# Altium PCB ConverterPCB.PcbDoc
Units mm, origin at the board's own origin, x right, y up, seen from the top; angles counter-clockwise.
Board outline 217.17 x 123.44 mm, 2 copper layers (Top Layer, Bottom Layer); 78 components, 37 nets, 195 pads, 0 vias.
Unrouted connection lines stored in the file: 8.
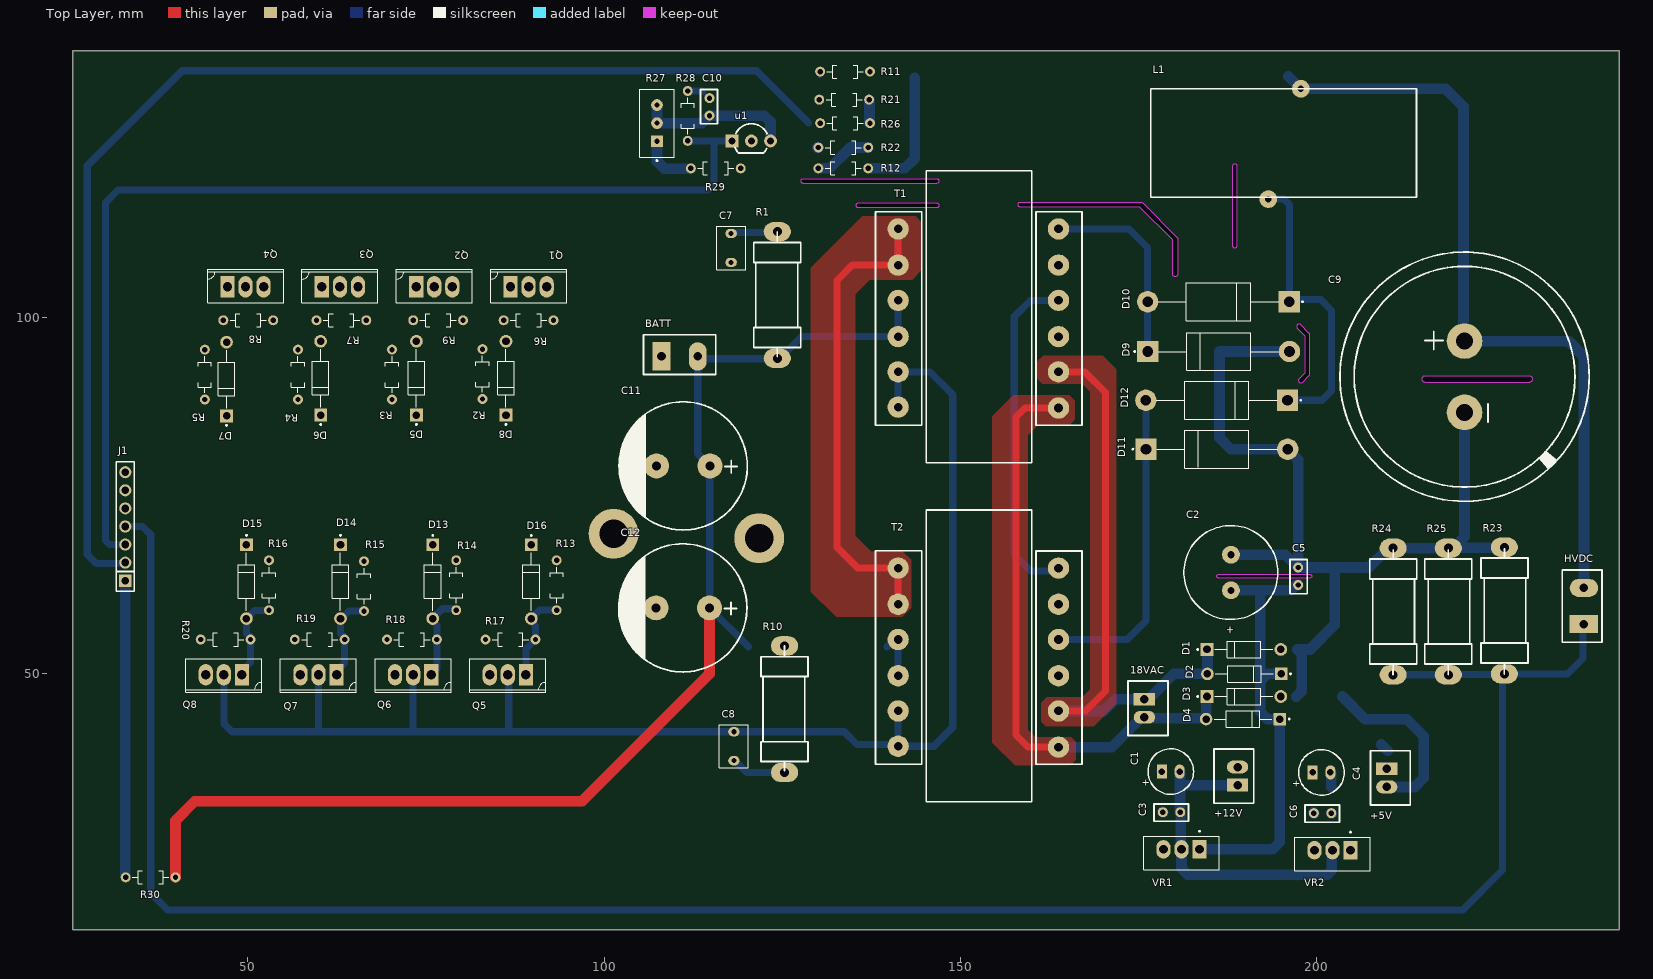
[diagram p0: Top Layer view]
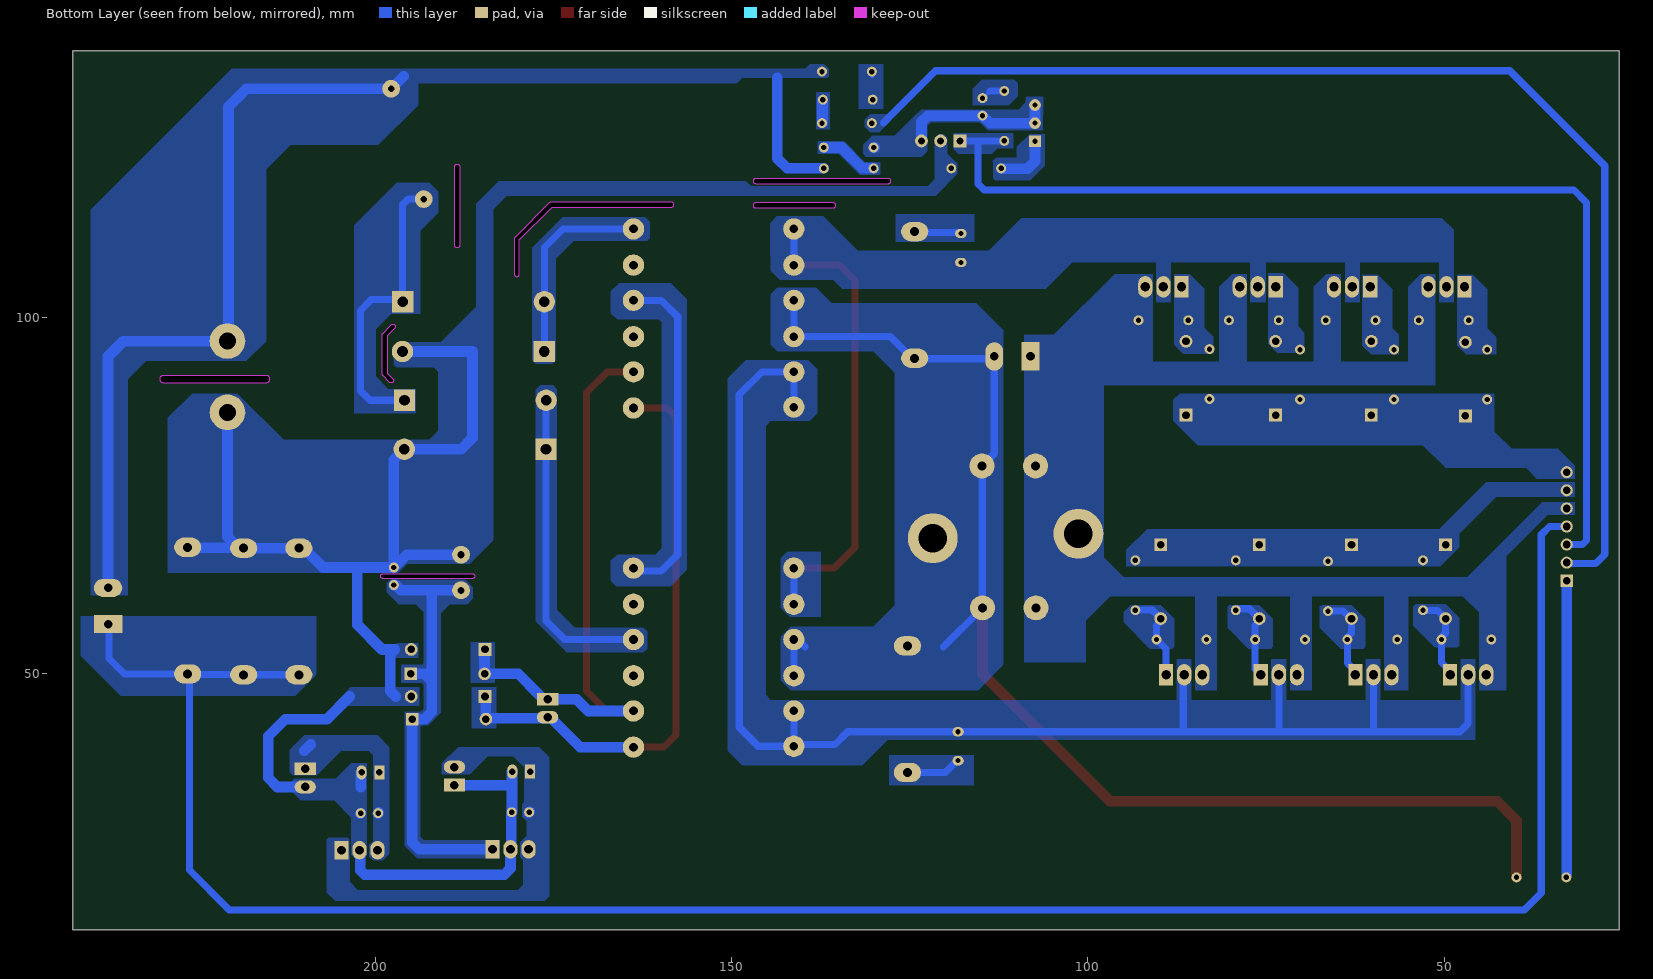
[diagram p1: Bottom Layer view, seen from below]
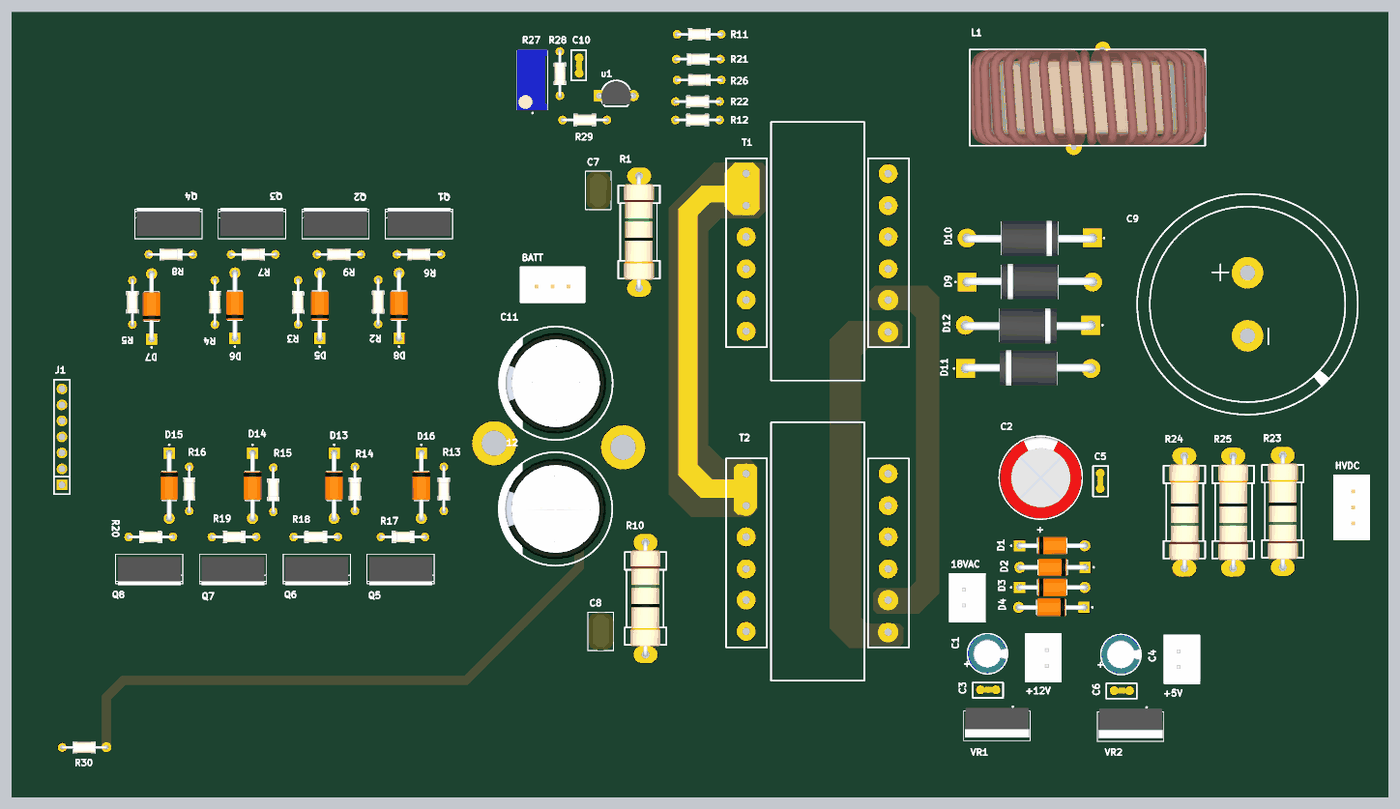
[diagram p2: 3D render of the assembled board from above, using the file's embedded part models]

## Layer stack, top to bottom
Top Solder: solder mask 0.0102, Solder Resist, Dk 3.5
Top Layer: signal copper 0.0356
Dielectric 1: dielectric 0.32, FR-4, Dk 4.8
Bottom Layer: signal copper 0.0356
Bottom Solder: solder mask 0.0102, Solder Resist, Dk 3.5

## Board outline
25.4,13.97 242.57,13.97 242.57,137.414 25.4,137.414
cut-out: 128.016,118.776 cw(c128.016,119.126) 128.016,119.476 146.685,119.476 cw(c146.685,119.126) 147.035,119.126 cw(c146.685,119.126) 146.685,118.776
cut-out: 135.763,115.347 cw(c135.763,115.697) 135.763,116.047 146.685,116.047 cw(c146.685,115.697) 147.035,115.697 cw(c146.685,115.697) 146.685,115.347
cut-out: 158.496,115.474 cw(c158.496,115.824) 158.496,116.174 175.387,116.174 cw(c175.387,115.824) 175.635,116.072 180.461,111.246 cw(c180.213,110.998) 180.563,110.998 180.563,106.045 cw(c180.213,106.045) 179.863,106.045 179.863,110.853 175.242,115.474
cut-out: 188.245,110.109 ccw(c188.595,110.109) 188.945,110.109 188.945,121.158 ccw(c188.595,121.158) 188.245,121.158
cut-out: 197.618,91.363 ccw(c197.866,91.116) 198.114,90.868 199.003,91.757 ccw(c198.755,92.005) 199.105,92.005 199.105,97.536 ccw(c198.755,97.536) 199.003,97.784 197.86,98.927 ccw(c197.612,98.679) 197.364,98.431 198.405,97.391 198.405,92.15
cut-out: 215.392,90.813 cw(c215.392,91.313) 215.392,91.813 229.87,91.813 cw(c229.87,91.313) 230.37,91.313 cw(c229.87,91.313) 229.87,90.813
cut-out: 186.309,63.377 cw(c186.309,63.627) 186.309,63.877 199.136,63.877 cw(c199.136,63.627) 199.386,63.627 cw(c199.136,63.627) 199.136,63.377

## Design rules (kind name [scope] priority, off if disabled: settings)
Clearance [All] p1: gap=0.254 ignorepadtopadclearanceinfootprint=FALSE except(0: Arc-Hole Track-Hole SMDPad-Hole THPad-Hole Via-Hole Fill-Hole Poly-Hole Region-Hole Text-Hole)
Height [All] p1: minheight=0 maxheight=50.4 prefheight=12.7
PolygonConnect [All] p1: connectstyle=Direct reliefconductorwidth=0.254 reliefentries=4 polygonreliefangle="90 Angle" airgapwidth=0.254
RoutingVias [All] p1: holewidth=0.711 width=1.27 viastyle="Through Hole" minholewidth=0.711 minwidth=1.27 maxholewidth=0.711 maxwidth=1.27
SolderMaskExpansion [All] p1: expansion=0.102 istentingtop=FALSE
Width [All] p1: maxlimit=1.5 minlimit=0.254 preferedwidth=0.8 minimp=50.000000 maximp=50.000000 favimp=50.000000
29 further rules are at their usual default settings.

## Classes and differential pairs
component class DC_Power: 18VAC +5V +12V C1 C2 C3 C4 C5 C6 D1 D2 D3 D4 VR1 VR2
component class Converter_Main_HV: BATT C7 C8 C9 C10 C11 C12 D5 D6 D7 D8 D9 D10 D11 D12 D13 D14 D15 D16 HVDC J1 L1 Q1 Q2 Q3 Q4 Q5 Q6 Q7 Q8 Q11 Q12 Q13 R1 R2 R3 R4 R5 R6 R7 R8 R9 R10 R11 R12 R13 R14 R15 R16 R17 R18 R19 R20 R21 R22 R23 R24 R25 R26 R27 R28 R29 R30 T1 T2 u1

## Components (designator, comment, footprint, x,y, rotation, side; value= is the part's Value field where it differs from the comment)
18VAC "2pos" 2POS 175.895,46.355 r270 top
+5V "2pos" 2POS 209.931,36.576 r270 top
+12V "2pos" 2POS 188.976,34.29 r90 top
BATT "2pos-3" "2POS - 3" 110.617,94.488 r0 top
C1 "100UF25V" "CAP LS-2.5mm D6.3 H7 - duplicate" 178.348,36.195 r0 top
C2 "470UF50V" CAP_RADIAL_D13.0_P5.0_H20.0 188.087,64.135 r270 top
C3 "1UFCER" CAP-CER-2.54 179.705,30.48 r180 top
C4 "100UF25V" "CAP LS-2.5mm D6.3 H7 - duplicate" 199.517,36.068 r0 top
C5 "1UFCER" CAP-CER-2.54 197.485,63.627 r270 top
C6 "1UFCER" CAP-CER-2.54 200.914,30.353 r180 top
C7 "0.1uF" CAP-P_Pilm 117.856,109.728 r270 top
C8 "0.1uF" CAP-P_Pilm 118.237,39.751 r270 top
C9 "1000UF400V" CAP-TH_BD35.0-P10.00-D2.3-FD 220.853,91.647 r270 top
C10 "100nFCER" CAP-CER-2.54 114.808,129.54 r90 top
C11 "4700UF 35V" CAP-TH_BD18.0-P7.50-D1.2-FD 111.125,79.121 r180 top
C12 "4700UF 35V" CAP-TH_BD18.0-P7.50-D1.2-FD 111.065,59.183 r180 top
D1 "FR107" DIOAD1036W78L470D235 189.865,53.34 r0 top
D2 "FR107" DIOAD1036W78L470D235 189.923,49.911 r180 top
D3 "FR107" DIOAD1036W78L470D235 189.865,46.736 r0 top
D4 "FR107" DIOAD1036W78L470D235 189.738,43.561 r180 top
D5 "1N4148" DIOAD1036W78L470D235 73.66,91.44 r90 top
D6 "1N4148" DIOAD1036W78L470D235 60.198,91.44 r90 top
D7 "1N4148" DIOAD1036W78L470D235 46.99,91.313 r90 top
D8 "1N4148" DIOAD1036W78L470D235 86.233,91.44 r90 top
D9 "FR307" DO-27_BD5.3-L8.4-P12.40-D1.3-RD 185.928,95.123 r0 top
D10 "FR307" DO-27_BD5.3-L8.4-P12.40-D1.3-RD 186.69,102.235 r180 top
D11 "FR307" DO-27_BD5.3-L8.4-P12.40-D1.3-RD 185.674,81.407 r0 top
D12 "FR307" DO-27_BD5.3-L8.4-P12.40-D1.3-RD 186.436,88.392 r180 top
D13 "1N4148" DIOAD1036W78L470D235 75.946,62.865 r270 top
D14 "1N4148" DIOAD1036W78L470D235 62.992,62.865 r270 top
D15 "1N4148" DIOAD1036W78L470D235 49.784,62.865 r270 top
D16 "1N4148" DIOAD1036W78L470D235 89.789,62.865 r270 top
HVDC "2pos-3" "2POS - 3" 237.617,59.436 r90 top
J1 "HDR7Pin" "HDR-TH 7P - male hader" 32.738,70.588 r90 top
L1 "Troidal core  220uH" "TOROIDAL CORE INDUCTOR" 195.58,124.46 r0 top
Q1 "IRF3205" TO-220 89.408,104.267 r0 top
Q2 "IRF3205" TO-220 76.158,104.267 r0 top
Q3 "IRF3205" TO-220 62.907,104.267 r0 top
Q4 "IRF3205" TO-220 49.657,104.267 r0 top
Q5 "IRF3205" TO-220 86.487,49.784 r180 top
Q6 "IRF3205" TO-220 73.194,49.784 r180 top
Q7 "IRF3205" TO-220 59.902,49.784 r180 top
Q8 "IRF3205" TO-220 46.609,49.784 r180 top
R1 "RES-0.5W-27R" "RES_TH 3W" 124.333,104.14 r90 top
R2 "10R" RES-TH-7mm 82.931,92.019 r90 top
R3 "10R" RES-TH-7mm 70.231,91.948 r90 top
R4 "10R" RES-TH-7mm 57.023,91.948 r90 top
R5 "10R" RES-TH-7mm 43.942,91.948 r90 top
R6 "10K" RES-TH-7mm 89.408,99.568 r180 top
R7 "10K" RES-TH-7mm 63.119,99.568 r0 top
R8 "10K" RES-TH-7mm 50.038,99.568 r0 top
R9 "10K" RES-TH-7mm 76.708,99.568 r0 top
R10 "RES-0.5W-27R" "RES_TH 3W" 125.349,45.974 r90 top
R11 "150K" RES-TH-7mm 133.858,134.493 r0 top
R12 "1M" RES-TH-7mm 133.604,120.904 r0 top
R13 "10R" RES-TH-7mm 93.345,62.357 r270 top
R14 "10R" RES-TH-7mm 79.248,62.357 r270 top
R15 "10R" RES-TH-7mm 66.294,62.23 r270 top
R16 "10R" RES-TH-7mm 52.959,62.357 r270 top
R17 "10K" RES-TH-7mm 86.868,54.737 r0 top
R18 "10K" RES-TH-7mm 73.025,54.737 r180 top
R19 "10K" RES-TH-7mm 60.071,54.737 r180 top
R20 "10K" RES-TH-7mm 46.863,54.737 r180 top
R21 "150K" RES-TH-7mm 133.731,130.556 r180 top
R22 "0.5M" RES-TH-7mm 133.604,123.825 r0 top
R23 "RES-2W-1R" "RES_TH 3W" 226.441,57.785 r270 top
R24 "RES-2W-1R" "RES_TH 3W" 210.82,57.658 r270 top
R25 "RES-2W-1R" "RES_TH 3W" 218.567,57.658 r270 top
R26 "40K" RES-TH-7mm 133.858,127.254 r0 top
R27 "10K" TRIM_3296W-1-250 107.442,127.254 r90 top
R28 "4.7K" RES-TH-7mm 111.76,128.27 r90 top
R29 "4.7K" RES-TH-7mm 115.697,120.904 r180 top
R30 "0R" RES-TH-7mm 36.322,21.336 r0 top
T1 "current transformer" EE35-FP16 152.57,99.822 r0 top
T2 "current transformer" EE35-FP16 152.57,52.197 r0 top
u1 "TL431" TO-92 120.777,124.714 r0 top
VR1 "LM7812CT" TO254P1054X470X1955-3 181.102,25.273 r180 top
VR2 "LM7805CT" TO254P1054X470X1955-3 202.311,25.146 r180 top

## Footprints (in the part's own frame and the unit in brackets; to place one, negate y for a bottom-side part, rotate by r counter-clockwise, add the part's x,y. Pads: shape width x height; smd on the part's side, far side on the other; paste and mask are expansions set on the pad)
2POS [mm]
  rect 1.8x3 hole 1.2: 1(0,0)
  oval 1.8x3 hole 1.2: 2(2.54,0)
  silkscreen extent -2.54,-2.29 5.08,3.3, body extent -2.47,-2.32 4.96,3.41, height 6.69
"2POS - 3" [mm]
  rect 2.5x4 hole 1.2: 1(-2.54,0)
  oval 2.5x4 hole 1.2: 2(2.54,0)
  silkscreen extent -5.08,-2.54 5.08,3.05, body extent -5.04,-2.54 5.04,3.16, height 7.01
"CAP LS-2.5mm D6.3 H7 - duplicate" [mm]
  rect 1.4x2 hole 0.9: 1(0,0)
  oval 1.4x2 hole 0.9: 2(2.5,0)
  silkscreen extent -1.95,-3.2 4.45,3.2, body extent -1.89,-3.14 4.39,3.14, height 7
CAP-CER-2.54 [mm]
  round 1.397 hole 0.75: 1(-1.225,0) 2(1.225,0)
  silkscreen extent -2.37,-1.14 2.46,1.27, body extent -1.62,-0.5 1.62,0.5, height 4.99
CAP-P_Pilm [mm]
  oval 1.3x1.6 hole 0.71: 1(-2.032,0) 2(2.032,0)
  silkscreen extent -3.05,-2.03 3.05,2.03, body extent -3,-2 3,2, height 12.5
CAP-TH_BD18.0-P7.50-D1.2-FD [mm]
  round 3.5 hole 1.25 paste+0 mask+0.051: 1(-3.75,0.001) 2(3.75,0.001)
  silkscreen extent -9,-9 9,9, body extent -8,-8 8,8, height 35
CAP-TH_BD35.0-P10.00-D2.3-FD [mm]
  round 5 hole 2.4 paste+0 mask+0.051: 1(-5,0) 2(5,0)
  silkscreen extent -17.5,-17.5 17.5,17.5, body extent -15,-15 15,15, height 34.94
CAP_RADIAL_D13.0_P5.0_H20.0 [mm]
  round 2.5 hole 1: 1(2.487,-0.044) 2(-2.513,-0.044)
  silkscreen extent -6.61,-6.64 6.59,6.56, body extent -6.49,-6.52 6.5,6.47, height 19.89
DIOAD1036W78L470D235 [mm]
  rect 1.778x1.778 hole 1.06: 1(-5.18,0)
  round 1.778 hole 1.06: 2(5.18,0)
  silkscreen extent -6.6,-1.17 4.07,1.17, body extent -5.55,-1.4 5.55,1.4, height 2.8
DO-27_BD5.3-L8.4-P12.40-D1.3-RD [mm]
  round 3 hole 1.5 mask+0.102: A(10.341,0.059)
  rect 3x3 hole 1.5 mask+0.102: C(-9.559,0.059)
  silkscreen extent -11.51,-2.59 8.86,2.71, body extent -10.19,-2.62 10.96,2.96, height 5.6
EE35-FP16 [mm]
  round 3 hole 1.2 paste+0.102 mask+0.102: 1(-11.26,7.493) 1(-11.26,12.573) 2(-11.26,-2.54) 2(-11.26,2.54) 3(-11.26,-12.446) 3(-11.26,-7.493) 4(11.26,-12.573) 5(11.26,-7.493) 6(11.26,2.54) 7(11.26,12.573) ""(11.26,-2.54) ""(11.26,7.493)
  silkscreen extent -14.43,-20.25 14.57,20.75
"HDR-TH 7P - male hader" [mm]
  rect 1.7x1.7 hole 1.1 paste+0 mask+0.051: 1(-7.596,-0.028)
  round 1.7 hole 1.1 paste+0 mask+0.051: 2(-5.056,-0.028) 3(-2.516,-0.028) 4(0.024,-0.028) 5(2.564,-0.028) 6(5.104,-0.028) 7(7.644,-0.028)
  silkscreen extent -9.08,-1.3 9.12,1.24
RES-TH-7mm [mm]
  round 1.397 hole 0.75: 1(-3.5,0) 2(3.5,0)
  silkscreen extent -2.55,-0.92 2.55,0.92, body extent -3.72,-0.92 3.72,0.92, height 1.84
"RES_TH 3W" [mm] "Res_TH 3W"
  oval 2.7x3.81 hole 1.27: 1(-9.906,0) 2(7.874,0)
  silkscreen extent -9.66,-3.29 7.87,3.31, body extent -10.24,-2.36 8.25,2.42, height 5.72
TO254P1054X470X1955-3 [mm]
  rect 2x2.6 hole 1.24: 1(-2.54,0)
  oval 2x2.6 hole 1.24: 2(0,0) 3(2.54,0)
  silkscreen extent -5.27,-2.64 5.27,2.86, body extent -5.08,-2.35 5.08,2.35, height 15.49
TO-92 [mm]
  rect 1.8x1.8 hole 1 paste+0 mask+0.051: 1(-2.783,0.049)
  round 1.8 hole 1 paste+0 mask+0.051: 2(-0.083,0.049) 3(2.617,0.049)
  silkscreen extent -2.38,-1.65 2.12,2.46, body extent -2.91,-1.37 2.75,2.25, height 8.77
TO-220 [mm] "TO-220"
  rect 2x3 hole 1.32: 1(-2.54,0)
  oval 2x3 hole 1.32: 2(0,0) 3(2.54,0)
  silkscreen extent -5.34,-2.22 5.34,2.47, body extent -4.98,-1.76 4.98,2.69, height 19.68
"TOROIDAL CORE INDUCTOR" [mil]
  round 98.42 hole 36 paste+0 mask+2: 1(90,300) 2(-90,-310)
  silkscreen extent -740,-300 730,300, body extent -735,-297 735,297, height 1522
TRIM_3296W-1-250 [mil]
  rect 65x65 hole 27.95: 1(-100,0)
  round 65 hole 27.95: 2(0,0) 3(100,0)
  silkscreen extent -211,-95 188,95, body extent -188,-95 188,95, height 455

## Part data
18VAC +5V +12V BATT HVDC: "P2.54mm"
C1 C4: "CAP TH AL: 100U 25V", LCSC Part #=C43351, Unit Price=0.0057
C2: "CAP TH AL: 470U 50V", LCSC Part #=C43351, Unit Price=0.0057
C3 C5 C6: "CAP: CER 1UF 50V", LCSC Part #=C1848, Unit Price=0.0104
C7 C8: library part 0.1uF_film, "Cap Ceramic 0.1uF 100V X7R 10% Radial 2.54mm 125Â°C T/R", Package=None, Check_prices=https://www.snapeda.com/parts/SR201C104KARTR1/Kyocera/view-part/?ref=eda, MF="KYOCERA AVX", MP=SR201C104KARTR1, SnapEDA_Link=https://www.snapeda.com/parts/SR201C104KARTR1/Kyocera/view-part/?ref=snap
C9: "CAP TH AL: 1000U 400V", LCSC Part #=C43351, Unit Price=0.0057
C10: "CAP: CER 100nF 50V", LCSC Part #=C1848, Unit Price=0.0104
C11 C12: "CAP TH AL: 4700UF 35V", LCSC Part #=C43351, Unit Price=0.0057
D1 D2 D3 D4: "DIODE: GEN 1A 1.0V@1A 1kV DO-41 TH", LCSC Part #=C36138, Unit Price=0.0313
D5 D6 D7 D8 D13 D14 D15 D16: "Rectifier Diode Small Signal Switching 100V 0.3A 4ns 2-Pin DO-35 T/R", LCSC Part #=C36138, Unit Price=0.0313
D9 D10 D11 D12: "DIODE: 500ns, 3A, 1000V, Fast Recovery RectifierDO-201AD TH", LCSC Part #=C36138, Unit Price=0.0313
J1: "HEADER: 1*7P Male"
L1: library part Inductor, "Troidal core  inductor: 220uH"
Q1 Q2 Q3 Q4 Q5 Q6 Q7 Q8: "MOSFET: N-CH 55V 110A TO-220", LCSC Part #=C274639, Unit Price=0.2595
R1 R10: "RES: 27 OHM 1% 0.5W TH"
R2 R3 R4 R5 R13 R14 R15 R16: "RES TH: 10R"
R6 R7 R8 R9 R17 R18 R19 R20: "RES TH: 10K"
R11 R21: "RES TH: 150K"
R12: "RES TH: 1M"
R22: "RES TH: 0.5M"
R23 R24 R25: "RES: 1 OHM 1% 2W TH"
R26: "RES TH: 40K"
R27: library part "10K POT", "RES TH: 10K POT"
R28 R29: "RES TH: 4.7K"
R30: "RES TH: JUMPER"
T1 T2: library part "EE42 transformer", "ferrite core transformer EE42"
u1: "Adjustable precision shunt regulator"
VR1: "1.5-A, 12-V, linear voltage regulator", Package="TO-220-3 Texas Instruments", Check_prices=https://www.snapeda.com/parts/LM7812CT/NOPB/Texas+Instruments/view-part/?ref=eda, MF="Texas Instruments", MP=LM7812CT/NOPB, SnapEDA_Link=https://www.snapeda.com/parts/LM7812CT/NOPB/Texas+Instruments/view-part/?ref=snap
VR2: "1.5-A,  5-V, linear voltage regulator", Package="TO-220-3 Texas Instruments", Check_prices=https://www.snapeda.com/parts/LM7812CT/NOPB/Texas+Instruments/view-part/?ref=eda, MF="Texas Instruments", MP=LM7812CT/NOPB, SnapEDA_Link=https://www.snapeda.com/parts/LM7812CT/NOPB/Texas+Instruments/view-part/?ref=snap

## Free pads (board coordinates)
  round 7 hole 4: 2(121.793,68.961) 3(101.346,69.596)

## Nets (pads, with @x,y where several pads share a name; then routed paths per layer and width w, separated by ;. In a path a pad name is that pad's centre, name@x,y a point inside that pad or via, vN(x,y) a via of type N, cw(c..) or ccw(c..) an arc to the next point about the centre after c; other vN are vias at no path point)
+5: +5V.1 C4.1 C6.2 VR2.3 | length 1.8
  Bottom Layer w1.5: C4.1 C4.1@199.603,35.982 ; C6.2@199.603,30.439 C6.2 C6.2@199.73,30.312 ; VR2.3@199.73,25.187 VR2.3 ; 209.169,40.005 210.058,39.116 ; +5V.1 +5V.1@210.058,36.703
+12: +12V.2 C1.1 C3.2 VR1.3 VR2.1 | length 0.3
  Bottom Layer w1.5: C1.1 C1.1@178.414,36.129 ; C3.2@178.414,30.546 C3.2 C3.2@178.521,30.439 ; VR1.3@178.521,25.314 VR1.3
+18VAC: 18VAC.1 D1.1 D2.2 T1.5 T2.5 | length 84
  Top Layer w1: T2.5 167.64,44.704 170.434,47.498 170.434,89.408 167.513,92.329 T1.5
  Bottom Layer w1.5: T2.5 170.18,44.704 171.831,46.355 18VAC.1 176.495,46.355 177.145,47.005 177.145,47.025 180.031,49.911 D2.2 184.743,53.282 D1.1
-18VAC: 18VAC.2 D3.1 D4.2 T1.4 T2.4 | length 83.6
  Top Layer w1: T2.4 159.551,39.624 157.861,41.314 157.861,85.979 159.131,87.249 T1.4
  Bottom Layer w1.5: T2.4 171.323,39.624 175.514,43.815 18VAC.2 176.022,43.688 184.431,43.688 D4.2 184.558,46.609 D3.1
GND: BATT.1 C11.2 C12.2 J1.5 pad.3 Q1.3 Q2.3 Q3.3 Q4.3 Q5.3 Q6.3 Q7.3 Q8.3 R6.1 R7.2 R8.2 R9.2 R17.1 R18.2 R19.2 R20.2
GND1: +5V.2 +12V.1 C1.2 C2.2 C3.1 C4.2 C5.1 C6.1 C9.2 D1.2 D3.2 D9.A D11.A R23.1 R24.1 R25.1 R29.1 u1.2 VR1.2 VR2.2 | length 205.3
  Bottom Layer w1.5: C1.2 180.889,36.154 180.889,34.163 ; C2.2 195.689,66.648 C5.1 ; +12V.1 181.016,34.29 180.889,34.163 ; D9.A 186.436,95.182 186.436,83.058 188.028,81.466 D11.A 197.485,79.997 C5.1 ; 197.231,46.736 197.993,47.498 197.993,52.705 197.358,53.34 199.136,53.34 202.629,56.832 202.629,64.852 ; C4.2 202.139,35.946 202.139,34.036 ; C6.1 C6.1@202.225,30.267 ; VR2.2@202.225,25.232 VR2.2 202.184,25.019 202.184,22.352 201.549,21.717 181.991,21.717 181.102,22.606 VR1.2 181.016,25.359 181.016,30.394 C3.1 180.889,30.521 180.889,34.163 ; 203.712,46.732 206.883,43.561 212.725,43.561 215.138,41.148 215.138,40.894 215.138,35.306 213.868,34.036 +5V.2 ; C9.2 220.853,69.151 R25.1@219.329,67.627 ; R23.1 226.377,67.627 R25.1@219.329,67.627 ; C5.1 202.629,64.852 ; 202.629,64.852 207.409,64.852 210.121,67.564 R24.1 R25.1 219.266,67.564 R25.1@219.329,67.627
I_SENSE: HVDC.1 J1.4 R23.2 R24.2 R25.2 | length 307.3
  Bottom Layer w1: J1.4 35.179,70.612 36.342,69.449 36.342,19.157 38.735,16.764 220.599,16.764 226.187,22.352 R23.2@226.187,49.657 ; R24.2 R25.2 218.63,49.847 226.377,49.847 R23.2 235.331,49.911 237.49,52.07 237.49,56.769 HVDC.1
NetC2_1: C2.1 C5.2 D2.1 D4.1 VR1.1 | length 62.4
  Bottom Layer w1.5: VR1.1 193.929,25.273 194.918,26.262 D4.1 193.167,43.561 192.151,44.577 192.151,48.895 ; C2.1 192.266,61.648 ; D2.1 193.167,49.911 192.151,48.895 ; C5.2 197.242,62.402 196.488,61.648 192.266,61.648 ; 192.151,48.895 192.151,61.533 192.266,61.648
NetC7_1: C7.1 R1.2 | length 6.2
  Bottom Layer w0.5: C7.1@118.364,111.76 C7.1@118.491,111.887 ; R1.2@123.825,111.76 R1.2@123.888,111.697 ; R1.2@124.206,111.887 R1.2
  Bottom Layer w1: C7.1@118.491,111.887 R1.2@124.206,111.887
NetC7_2: C7.2 Q1.2 Q2.2 Q3.2 Q4.2 T1.1 T2.1 | length 77.6
  Top Layer w1: T2.1@141.31,59.69 141.31,64.77 135.636,64.77 132.715,67.691 132.715,105.156 134.874,107.315 141.31,107.315 T1.1@141.31,112.395
  Bottom Layer w1: T1.1@140.929,107.696 141.31,107.315 T1.1@141.31,112.395 ; T2.1@141.31,59.69 T2.1@141.31,64.77
NetC8_1: C8.1 Q5.2 Q6.2 Q7.2 Q8.2 T1.3 T2.3 | length 200.3
  Bottom Layer w1: Q8.2 46.609,42.926 47.752,41.783 59.902,41.783 73.194,41.783 86.614,41.783 ; 59.902,42.122 Q7.2 ; 73.194,42.122 Q6.2 ; Q5.2 86.614,49.657 86.614,41.783 ; T2.3@141.31,39.751 146.304,39.751 148.971,42.418 148.971,89.154 145.796,92.329 141.31,92.329 T1.3@141.31,87.376 ; T2.3@141.31,44.704 141.31,40.005 135.509,40.005 133.731,41.783 C8.1 86.614,41.783
NetC8_2: C8.2 R10.1 | length 7.8
  Bottom Layer w1: C8.2 118.387,37.719 120.038,36.068 R10.1
NetC9_1: C9.1 HVDC.2 L1.1 R11.2 R12.2 | length 128
  Bottom Layer w1.5: R12.2 142.24,120.904 143.637,122.301 143.637,133.604 ; 196.088,133.858 L1.1 218.186,132.08 220.704,129.562 220.704,96.796 C9.1 235.458,96.647 237.617,94.488 HVDC.2
NetC10_1: C10.1 R22.1 R27.2 R27.3 u1.3 | length 22.1
  Bottom Layer w1.5: R27.3 R27.2 113.747,127.254 C10.1 122.51,128.315 123.394,127.431 u1.3 ; R22.1@129.932,123.825 R22.1
NetC10_2: C10.2 R28.2 | length 3.5
  Bottom Layer w0.5: 113.765,131.77 114.77,130.765 C10.2
  Bottom Layer w1: R28.2 113.765,131.77
NetD5_2: D5.2 Q2.1 R3.2 R9.1
NetD6_2: D6.2 Q3.1 R4.2 R7.1
NetD7_2: D7.2 Q4.1 R5.2 R8.1
NetD8_2: D8.2 Q1.1 R2.2 R6.2
NetD9_C: D9.C D10.A T1.7 | length 28.2
  Bottom Layer w1: T1.7 173.736,112.395 176.349,109.782 D10.A 176.349,95.203 D9.C
NetD10_C: D10.C D12.C L1.2 | length 41.6
  Bottom Layer w1: L1.2 195.453,116.586 196.249,115.79 D10.C 196.562,102.489 200.66,102.489 202.184,100.965 202.184,89.662 200.855,88.333 D12.C
NetD11_C: D11.C D12.A T2.6 | length 44.3
  Bottom Layer w1: T2.6 173.482,54.737 176.115,57.37 D11.C 176.095,81.487 D12.A
NetD13_2: D13.2 Q6.1 R14.2 R18.1 | length 12.4
  Bottom Layer w1: Q6.1 76.525,50.575 R18.1 76.525,56.694 75.946,57.273 D13.2 77.316,59.055 79.05,59.055 R14.2
NetD14_2: D14.2 Q7.1 R15.2 R19.1 | length 12.3
  Bottom Layer w1: Q7.1 62.442,50.284 63.571,51.413 R19.1 63.571,55.046 62.992,55.625 D14.2 63.135,57.685 64.18,58.73 R15.2
NetD15_2: D15.2 Q8.1 R16.2 R20.1 | length 12.3
  Bottom Layer w1: Q8.1 49.149,50.284 50.363,51.498 R20.1 50.363,55.046 49.784,55.625 D15.2 50.9,58.801 52.903,58.801 R16.2
NetD16_2: D16.2 Q5.1 R13.2 R17.2 | length 12.7
  Bottom Layer w1: Q5.1 89.027,53.396 R17.2 90.368,56.694 89.789,57.273 D16.2 90.961,58.857 R13.2
NetJ1_1: J1.1 R30.1 | length 41.7
  Bottom Layer w1: R30.1@32.766,21.762 32.949,21.579 R30.1@32.949,21.336
  Bottom Layer w1.5: R30.1@32.766,21.762 J1.1
NetR11_1: R11.1 R21.2 | length 0.8
  Bottom Layer w0.5: R21.2 R21.2@130.294,130.619 ; 130.294,133.794 130.294,134.429 R11.1
NetR12_1: R12.1 R22.2 | length 8.2
  Bottom Layer w1.5: R12.1 131.699,120.904 134.62,123.825 R22.2
NetR21_1: R21.1 R26.2 | length 3.4
  Bottom Layer w0.5: R21.1 R21.1@137.295,130.493 ; R26.2@137.295,127.317 R26.2
  Bottom Layer w1.5: R26.2@137.295,127.317 R21.1@137.295,130.493
NetR27_1: R27.1 R29.2 | length 8
  Bottom Layer w1.5: R27.1 107.442,121.92 108.505,120.857 112.15,120.857 R29.2
NetT1_6: T1.6 T2.7 | length 47.9
  Bottom Layer w1: T2.7 163.402,64.342 159.94,64.342 157.607,66.675 157.607,100.076 159.893,102.362 T1.6
opto_A: J1.2 R26.1 | length 170.4
  Bottom Layer w1: J1.2 32.639,65.405 28.702,65.405 27.432,66.675 27.432,121.285 40.767,134.62 121.412,134.62 128.745,127.287
opto_C: J1.3 R28.1 u1.1 | length 149.3
  Bottom Layer w1: J1.3 30.558,68.072 29.972,68.658 29.972,116.078 31.75,117.856 114.564,117.856 115.443,118.735 115.443,124.77 ; R28.1 116.078,124.77 116.586,124.77 ; 116.586,124.763 u1.1
PULSE_A_G: D5.1 D6.1 D7.1 D8.1 J1.7 R2.1 R3.1 R4.1 R5.1
PULSE_B_G: D13.1 D14.1 D15.1 D16.1 J1.6 R13.1 R14.1 R15.1 R16.1
VBATT: BATT.2 C11.1 C12.1 pad.2 R1.1 R10.2 R30.2 T1.2 T2.2 | length 185.9
  Top Layer w1.5: R30.2 39.822,29.281 42.545,32.004 96.901,32.004 114.815,49.918 C12.1
  Bottom Layer w1: 120.276,53.721 C12.1 114.845,59.212 114.845,79.09 C11.1 113.157,80.838 BATT.2 113.474,94.17 124.65,94.17 127.762,97.282 141.31,97.282 T1.2@141.31,102.362 ; 139.753,53.721 140.769,54.737 T2.2@141.31,54.737 ; T2.2@141.31,49.657 T2.2@141.31,54.442
pads on no net: T1. T2.

## Polygon pours and split planes (outlines as drawn)
+18VAC on Top Layer "+18VAC_L01_P041" (solid, pour order 41): 161.417,43.18 162.052,42.545 168.783,42.545 171.958,45.72 171.958,92.71 170.053,94.615 161.671,94.615 160.782,93.726 160.782,91.44 161.544,90.678 167.132,90.678 168.275,89.535 168.275,47.752 167.132,46.609 162.179,46.609 161.417,45.847
-18VAC on Top Layer "-18VAC_L01_P040" (solid, pour order 40): 166.243,37.846 165.481,37.084 157.734,37.084 154.559,40.259 154.559,86.106 157.48,89.027 165.354,89.027 166.116,88.265 166.116,85.598 165.354,84.836 160.909,84.836 159.512,83.439 159.512,42.037 160.528,41.021 165.608,41.021 166.243,40.386
NetC7_2 on Top Layer "NETC7_2_L01_P000" (solid, pour order 0): 129.032,61.468 132.588,57.912 141.859,57.912 143.129,59.182 143.129,65.913 141.986,67.056 137.541,67.056 135.255,69.342 135.255,103.251 137.287,105.283 143.256,105.283 144.653,106.68 144.653,113.284 143.764,114.173 136.271,114.173 129.032,106.934
NetC7_2 on Bottom Layer "NETC7_2_L02_P004" (solid, pour order 4): 143.129,59.182 141.859,57.912 137.541,57.912 137.541,67.056 142.24,67.056 143.129,66.167
GND on Bottom Layer (solid, pour order 84): 31.623,72.263 35.433,72.263 41.275,66.421 41.275,47.625 45.085,47.625 45.085,58.547 47.371,60.833 54.991,60.833 54.991,47.625 58.42,47.625 58.42,60.833 68.58,60.833 68.58,47.625 71.628,47.625 71.628,60.833 81.915,60.833 81.915,47.625 84.963,47.625 84.963,60.833 96.901,60.833 100.33,57.404 100.33,51.562 108.966,51.562 108.966,97.536 104.775,97.536 96.266,106.045 90.932,106.045 90.932,93.726 81.534,93.726 81.534,104.267 79.756,106.045 77.724,106.045 77.724,93.726 68.284,93.726 68.284,104.267 66.506,106.045 64.474,106.045 64.474,93.726 55.033,93.726 55.033,104.267 53.255,106.045 51.223,106.045 51.223,92.964 51.234,92.964 51.234,90.424 97.79,90.424 97.79,66.294 94.996,63.5 46.736,63.5 36.195,74.041 31.623,74.041
NetD7_2 on Bottom Layer "NETD7_2_L02_P068" (solid, pour order 68): 43.878,103.85 43.942,103.786 43.942,98.452 42.672,97.182 42.672,94.769 46.874,94.769 48.133,96.028 48.133,105.945 45.974,105.945
NetD6_2 on Bottom Layer "NETD6_2_L02_P067" (solid, pour order 67): 57.213,103.85 57.277,103.786 57.277,98.452 56.388,97.563 56.388,94.769 60.209,94.769 61.468,96.028 61.468,105.945 59.309,105.945
NetD5_2 on Bottom Layer "NETD5_2_L02_P066" (solid, pour order 66): 70.421,104.104 70.485,104.04 70.485,98.706 69.596,97.817 69.596,95.023 73.417,95.023 74.676,96.282 74.676,106.199 72.517,106.199
PULSE_A_G on Bottom Layer "PULSE_A_G_L02_P063" (solid, pour order 63): 34.036,81.534 40.513,81.534 42.926,83.947 42.926,89.281 87.122,89.281 88.011,88.392 88.011,85.471 84.582,82.042 52.959,82.042 49.784,78.867 38.481,78.867 36.957,77.343 31.623,77.343 31.623,79.121
NetD8_2 on Bottom Layer "NETD8_2_L02_P062" (solid, pour order 62): 83.629,103.95 83.693,103.886 83.693,98.552 82.423,97.282 82.423,94.869 86.625,94.869 87.884,96.128 87.884,106.045 85.725,106.045
NetC7_2 on Bottom Layer "NETC7_2_L02_P019" (solid, pour order 19): 88.392,102.108 90.424,102.108 90.424,110.49 88.392,110.49 88.392,103.505
NetC7_2 on Bottom Layer "NETC7_2_L02_P018" (solid, pour order 18): 77.216,102.108 77.216,110.236 75.057,110.236 75.057,102.108 75.057,110.236 75.057,102.108
NetC7_2 on Bottom Layer "NETC7_2_L02_P017" (solid, pour order 17): 63.881,102.108 63.881,110.236 61.849,110.236 61.849,102.108 61.849,110.236 61.849,102.108
NetC7_2 on Bottom Layer "NETC7_2_L02_P016" (solid, pour order 16): 50.673,102.108 50.673,110.363 48.641,110.363 48.641,102.108
GND1 on Bottom Layer "GND1_L02_P083" (solid, pour order 83): 194.056,52.197 194.056,54.229 197.104,54.229 197.358,53.975 197.358,52.197
+12 on Bottom Layer "+12_L02_P082" (solid, pour order 82): 186.817,35.814 190.754,35.814 190.754,37.338 188.468,39.624 177.038,39.624 175.641,38.227 175.641,18.669 176.276,18.034 205.74,18.034 206.883,19.177 206.883,26.67 206.629,26.924 203.962,26.924 203.708,26.67 203.708,20.701 202.565,19.558 180.086,19.558 179.324,20.32 179.324,23.749 179.705,24.13 179.705,26.289 178.816,27.178 178.816,29.21 179.451,29.845 179.451,31.623 179.197,31.877 179.197,36.83 180.721,38.354 184.277,38.354
+5 on Bottom Layer "+5_L02_P081" (solid, pour order 81): 200.406,23.749 199.009,23.749 198.12,24.638 198.12,39.624 199.771,41.275 210.058,41.275 212.09,39.243 212.09,36.068 211.709,35.687 208.28,35.687 204.851,39.116 201.041,39.116 200.406,38.481 200.406,26.416 200.914,25.908 200.914,24.257
GND1 on Bottom Layer "GND1_L02_P080" (solid, pour order 80): 201.295,37.338 203.454,37.338 205.613,35.179 211.455,35.179 211.836,34.798 211.836,33.401 210.566,32.131 205.867,32.131 203.454,29.718 203.454,24.511 202.565,23.622 202.057,23.622 201.295,24.384
GND1 on Bottom Layer "GND1_L02_P079" (solid, pour order 79): 203.581,48.006 204.089,47.498 204.089,45.466 193.929,45.466 193.929,48.006
NetC2_1 on Bottom Layer "NETC2_1_L02_P078" (solid, pour order 78): 193.65,48.641 193.65,51.181 196.469,51.181 196.469,48.641
-18VAC on Bottom Layer "-18VAC_L02_P077" (solid, pour order 77): 183.105,42.291 183.105,48.006 186.534,48.006 186.534,42.291
+18VAC on Bottom Layer "+18VAC_L02_P076" (solid, pour order 76): 183.29,48.641 183.29,54.356 186.719,54.356 186.719,48.641
NetC10_1 on Bottom Layer "NETC10_1_L02_P075" (solid, pour order 75): 124.333,128.27 127.127,125.476 130.302,125.476 131.572,124.206 131.572,122.936 131.191,122.555 123.317,122.555 122.555,123.317 122.555,128.369
opto_A on Bottom Layer "OPTO_A_L02_P074" (solid, pour order 74): 130.556,125.984 131.318,126.746 131.318,127.762 130.556,128.524 127.762,128.524 127.762,127.508 129.286,125.984
NetC10_2 on Bottom Layer "NETC10_2_L02_P073" (solid, pour order 73): 116.205,129.794 111.125,129.794 109.855,131.064 109.855,132.842 110.363,133.35 114.935,133.35 116.205,132.08
opto_C on Bottom Layer "OPTO_C_L02_P072" (solid, pour order 72): 110.49,125.857 118.872,125.857 118.872,123.571 118.237,122.936 113.538,122.936 112.776,123.698 110.49,123.698
NetR27_1 on Bottom Layer "NETR27_1_L02_P071" (solid, pour order 71): 106.045,125.73 108.204,125.73 109.982,123.952 109.982,122.428 112.903,122.428 113.411,121.92 113.284,121.793 113.284,119.507 113.03,119.253 108.077,119.253 106.045,121.285
PULSE_B_G on Bottom Layer "PULSE_B_G_L02_P064" (solid, pour order 64): 47.879,69.596 42.672,74.803 31.623,74.803 31.623,76.835 44.069,76.835 50.673,70.231 91.694,70.231 94.615,67.31 94.615,65.024 50.546,65.024 47.879,67.691
NetD15_2 on Bottom Layer "NETD15_2_L02_P054" (solid, pour order 54): 54.356,56.67 51.308,53.622 48.133,53.622 47.879,53.876 47.879,57.813 49.784,59.718 53.975,59.718 54.356,59.337
NetD14_2 on Bottom Layer "NETD14_2_L02_P053" (solid, pour order 53): 67.437,56.388 64.516,53.467 61.341,53.467 61.087,53.721 61.087,57.658 62.992,59.563 67.183,59.563 67.437,59.309
NetD13_2 on Bottom Layer "NETD13_2_L02_P052" (solid, pour order 52): 80.391,56.388 77.47,53.467 74.295,53.467 74.041,53.721 74.041,57.658 75.946,59.563 80.137,59.563 80.391,59.309
NetD16_2 on Bottom Layer "NETD16_2_L02_P051" (solid, pour order 51): 94.996,57.15 91.313,53.467 88.138,53.467 87.884,53.721 87.884,57.658 89.789,59.563 93.98,59.563 94.996,58.547
GND1 on Bottom Layer "GND1_L02_P033" (solid, pour order 33): 127.508,118.364 147.32,118.364 148.082,119.126 182.753,119.126 185.928,115.951 185.928,101.473 190.881,96.52 196.977,96.52 197.485,96.012 197.485,93.345 197.104,92.964 191.897,92.964 191.262,92.329 191.262,84.074 192.532,82.804 212.979,82.804 219.456,89.281 225.806,89.281 229.235,85.852 229.235,64.011 196.85,64.135 195.58,65.405 186.817,65.405 183.515,68.707 183.515,115.189 181.61,117.094 122.428,117.094 122.555,117.221 122.555,118.364
NetC9_1 on Bottom Layer "NETC9_1_L02_P046" (solid, pour order 46): 136.398,133.858 136.652,133.604 148.59,133.604 149.352,132.842 194.564,132.842 194.564,134.874 139.7,134.874 139.065,135.509 137.033,135.509 136.398,134.874
NetC10_1 on Bottom Layer "NETC10_1_L02_P045" (solid, pour order 45): 106.267,130.937 108.585,130.937 108.712,130.81 108.712,130.175 109.728,129.159 123.444,129.159 124.333,128.27 124.333,123.698 122.555,123.698 122.555,126.873 122.047,127.381 115.189,127.381 114.046,126.238 106.329,126.238
NetR11_1 on Bottom Layer "NETR11_1_L02_P044" (solid, pour order 44): 128.778,129.286 128.778,135.509 132.207,135.509 132.207,129.286
NetR21_1 on Bottom Layer "NETR21_1_L02_P043" (solid, pour order 43): 136.271,131.572 138.176,131.572 138.176,126.365 136.271,126.365
NetR12_1 on Bottom Layer "NETR12_1_L02_P042" (solid, pour order 42): 129.159,121.793 131.318,121.793 134.239,124.714 137.922,124.714 137.922,122.936 135.001,122.936 132.08,120.015 129.159,120.015
I_SENSE on Bottom Layer "I_SENSE_L02_P039" (solid, pour order 39): 241.427,52.451 235.839,46.863 211.328,46.863 208.407,49.784 208.407,58.039 241.427,58.039
NetC2_1 on Bottom Layer "NETC2_1_L02_P038" (solid, pour order 38): 198.501,62.611 197.993,63.119 187.452,63.119 186.436,62.103 186.436,60.452 187.198,59.69 189.611,59.69 190.881,58.42 190.881,44.45 192.659,42.672 193.548,42.672 193.802,42.418 193.802,27.051 193.294,26.543 182.626,26.543 182.626,24.003 194.183,24.003 195.961,25.781 195.961,44.577 193.675,44.577 193.294,44.958 193.294,48.387 193.675,48.768 193.675,48.895 196.088,48.895 196.088,50.927 193.802,50.927 193.294,51.435 193.294,58.547 194.437,59.69 196.786,59.69 198.501,61.404
GND1 on Bottom Layer "GND1_L02_P037" (solid, pour order 37): 121.031,125.73 121.539,125.222 121.539,119.38 122.57,118.349 122.594,117.094 121.412,117.094 118.364,120.142 118.364,121.666 118.491,121.666 119.761,122.936 119.761,125.222 120.269,125.73
NetC9_1 on Bottom Layer "NETC9_1_L02_P034" (solid, pour order 34): 194.056,129.794 199.644,124.206 211.963,124.206 215.392,120.777 215.392,96.647 218.186,93.853 232.283,93.853 234.823,91.313 234.823,60.96 240.03,60.96 240.03,115.062 220.218,134.874 194.056,134.874
NetD10_C on Bottom Layer "NETD10_C_L02_P032" (solid, pour order 32): 191.262,117.602 192.532,118.872 197.104,118.872 203.073,112.903 203.073,86.487 194.437,86.487 194.437,89.916 198.247,89.916 200.025,91.694 200.025,98.298 197.866,100.457 193.802,100.457 193.802,112.141 191.262,114.681
NetD9_C on Bottom Layer "NETD9_C_L02_P031" (solid, pour order 31): 175.26,93.472 174.752,93.98 174.752,108.204 172.212,110.744 161.925,110.744 161.544,111.125 161.544,113.411 162.179,114.046 173.736,114.046 178.054,109.728 178.054,93.98 177.546,93.472
NetD11_C on Bottom Layer "NETD11_C_L02_P030" (solid, pour order 30): 161.925,53.467 162.433,52.959 173.228,52.959 177.546,57.277 177.546,89.789 176.911,90.424 175.133,90.424 174.625,89.916 174.625,58.928 172.085,56.388 162.433,56.388 161.925,55.88
NetT1_6 on Bottom Layer "NETT1_6_L02_P029" (solid, pour order 29): 167.005,62.992 166.243,62.23 158.623,62.23 156.337,64.516 156.337,102.489 158.623,104.775 165.862,104.775 167.005,103.632 167.005,100.584 166.116,99.695 160.274,99.695 159.893,99.314 159.893,67.564 160.782,66.675 166.116,66.675 167.005,65.786
NetC7_1 on Bottom Layer "NETC7_1_L02_P028" (solid, pour order 28): 115.951,110.617 115.951,114.427 127,114.427 127,110.617
NetC8_2 on Bottom Layer "NETC8_2_L02_P027" (solid, pour order 27): 116.078,38.481 127.889,38.481 127.889,34.29 116.078,34.29
NetC8_1 on Bottom Layer "NETC8_1_L02_P025" (solid, pour order 25): 85.471,51.943 85.471,44.45 87.503,44.45 87.503,51.943
NetC8_1 on Bottom Layer "NETC8_1_L02_P024" (solid, pour order 24): 72.136,45.593 74.295,45.593 74.295,51.943 72.136,51.943
NetC8_1 on Bottom Layer "NETC8_1_L02_P023" (solid, pour order 23): 58.928,45.339 60.96,45.339 60.96,51.943 58.928,51.943
NetC8_1 on Bottom Layer "NETC8_1_L02_P022" (solid, pour order 22): 45.593,51.943 45.593,45.466 47.625,45.466 47.625,51.943
NetC8_1 on Bottom Layer "NETC8_1_L02_P021" (solid, pour order 21): 45.593,46.228 139.192,46.228 139.192,37.084 131.699,37.084 128.143,40.64 45.593,40.64
NetC7_2 on Bottom Layer "NETC7_2_L02_P015" (solid, pour order 15): 137.16,114.173 132.334,109.347 113.919,109.347 109.347,113.919 50.292,113.919 48.641,112.268 48.641,107.696 102.235,107.696 105.918,104.013 134.493,104.013 135.763,105.283 143.256,105.283 144.526,106.553 144.653,110.617 144.653,113.221 143.701,114.173
VBATT on Bottom Layer "VBATT_L02_P003" (solid, pour order 3): 143.129,49.022 141.732,47.625 115.443,47.625 111.887,51.181 111.887,98.171 115.697,101.981 136.017,101.981 138.176,104.14 143.637,104.14 144.526,103.251 144.526,96.139 143.637,95.25 130.175,95.25 127.127,92.202 127.127,59.563 130.175,56.515 141.732,56.515 143.129,55.118
NetC8_1 on Bottom Layer "NETC8_1_L02_P001" (solid, pour order 1): 138.049,86.487 139.065,85.471 144.526,85.471 145.288,84.709 145.288,46.99 144.526,46.228 133.477,46.228 133.477,37.084 148.59,37.084 150.622,39.116 150.622,91.44 148.082,93.98 139.319,93.98 138.049,92.71
no net on Bottom Solder "NONET_L-01_P-001" (solid): 101.54,59.69 104.08,57.15 108.906,57.15 108.906,61.088 108.144,61.85 101.54,61.85
no net on Bottom Solder "NONET_L-01_P-001" (solid): 108.966,81.026 108.204,81.788 101.6,81.788 101.6,76.073 108.204,76.073 108.966,76.835
no net on Bottom Solder "NONET_L-01_P-001" (solid): 140.97,48.26 135.382,48.26 133.858,49.784 125.095,49.784 119.253,55.626 119.253,71.882 115.697,75.438 115.697,83.058 119.761,87.122 119.761,96.774 122.809,99.822 140.97,99.822 140.97,96.266 125.857,96.266 124.46,94.869 124.46,85.217 121.031,81.788 121.031,77.597 124.46,74.168 124.46,58.039 128.524,53.975 136.144,53.975 137.795,55.626 141.732,55.626 142.367,54.991 142.367,48.726
no net on Bottom Solder "NONET_L-01_P-001" (solid): 103.124,93.091 104.14,92.075 104.14,59.69 100.203,59.69 98.552,61.341 98.552,93.091
no net on Bottom Solder (solid): 43.434,61.595 44.831,62.992 103.632,62.992 103.632,61.341 84.667,61.341 84.667,48.895 83.016,48.895 83.016,61.341 71.416,61.341 71.416,48.895 69.765,48.895 69.765,61.341 58.166,61.341 58.166,48.895 56.515,48.895 56.515,61.341 45.593,61.341 45.085,60.833 45.085,49.276 43.434,49.276
no net on Bottom Solder (solid): 51.562,92.71 53.213,91.059 102.362,91.059 102.362,93.091 92.795,93.091 92.795,105.156 91.144,105.156 91.144,93.091 79.544,93.091 79.544,105.156 77.893,105.156 77.893,93.091 66.294,93.091 66.294,105.156 64.643,105.156 64.643,93.091 54.229,93.091 53.213,94.107 53.213,104.775 51.562,104.775
no net on Bottom Solder "NONET_L-01_P-001" (solid): 143.002,59.436 141.605,58.039 139.573,58.039 139.573,65.532 143.002,65.532
no net on Bottom Solder "NONET_L-01_P-001" (solid): 139.573,103.759 143.002,103.759 143.002,95.631 139.573,95.631
no net on Bottom Solder "NONET_L-01_P-001" (solid): 139.573,93.218 143.002,93.218 143.002,85.725 139.573,85.725
no net on Bottom Solder "NONET_L-01_P-001" (solid): 145.161,41.91 147.066,41.91 148.844,43.688 148.844,88.392 146.304,90.932 140.462,90.932 140.462,88.9 145.034,88.9 146.177,87.757 146.177,44.704 145.161,43.688
no net on Bottom Solder "NONET_L-01_P-001" (solid): 139.573,45.593 143.002,45.593 143.002,38.1 139.573,38.1
no net on Bottom Solder "NONET_L-01_P-001" (solid): 145.542,41.91 47.117,41.91 45.974,43.053 45.974,48.641 47.244,48.641 47.244,44.069 59.309,44.069 59.309,48.895 60.579,48.895 60.579,44.069 72.517,44.069 72.517,48.895 73.787,48.895 73.787,44.069 85.852,44.069 85.852,48.895 87.122,48.895 87.122,44.069 145.542,44.069
no net on Bottom Solder "NONET_L-01_P-001" (solid): 138.684,109.601 132.715,109.601 130.81,107.696 110.871,107.696 106.426,112.141 50.038,112.141 49.149,111.252 49.149,105.41 50.165,105.41 50.165,109.982 62.484,109.982 62.484,105.156 63.373,105.156 63.373,109.982 75.692,109.982 75.692,105.156 76.708,105.156 76.708,109.982 88.9,109.982 88.9,105.156 89.916,105.156 89.916,109.982 105.156,109.982 109.347,105.791 131.826,105.791 133.731,107.696 138.684,107.696
no net on Bottom Solder "NONET_L-01_P-001" (solid): 140.843,113.792 143.002,113.792 143.891,112.903 143.891,106.553 143.002,105.664 138.557,105.664 136.525,107.696 136.525,109.474
no net on Top Solder "NONET_L-01_P-001" (solid): 139.251,110.49 139.251,108.028 139.045,107.823 135.636,107.823 133.604,105.791 133.604,66.167 135.89,63.881 139.7,63.881 139.7,60.96 134.112,60.96 130.556,64.516 130.556,106.807 134.239,110.49
no net on Top Solder "NONET_L-01_P-001" (solid): 143.002,59.309 141.986,58.293 139.954,58.293 139.36,58.887 139.36,65.786 139.868,66.294 142.494,66.294 143.002,65.786
no net on Top Solder "NONET_L-01_P-001" (solid): 139.192,105.855 137.922,107.124 137.922,112.522 139.573,114.173 142.367,114.173 143.446,113.093 143.446,106.743 142.558,105.855

## Silkscreen, mask and mechanical layers (free items; w line width, h text height)
Mechanical 1:
  lines w0.5: 186.309,63.627 199.136,63.627
  lines w0.7: 128.016,119.126 146.685,119.126 ; 135.763,115.697 146.685,115.697 ; 158.496,115.824 175.387,115.824 180.213,110.998 180.213,106.045 ; 188.595,110.109 188.595,121.158 ; 197.612,98.679 198.755,97.536 198.755,92.005 197.866,91.116
  lines w1: 215.392,91.313 229.87,91.313
Board Shape:
  the board outline again, w1.2

## Text inside footprints (layer, text, board x,y; h text height)
C1: Top Overlay "+" at 175.49,34.169 h1
C2: Top Overlay "+" at 187.543,56.648 h1.02 r270; Top Assembly "+" at 187.543,56.648 h1.02 r270
C4: Top Overlay "+" at 196.659,34.042 h1